# Altium PCB PCB1.PcbDoc
Units mm, origin at the board's own origin, x right, y up, seen from the top; angles counter-clockwise.
Board outline 39.37 x 23.49 mm, 2 copper layers (Top Layer, Bottom Layer); 20 components, 9 nets, 40 pads, 24 vias.
Unrouted connection lines stored in the file: 1.
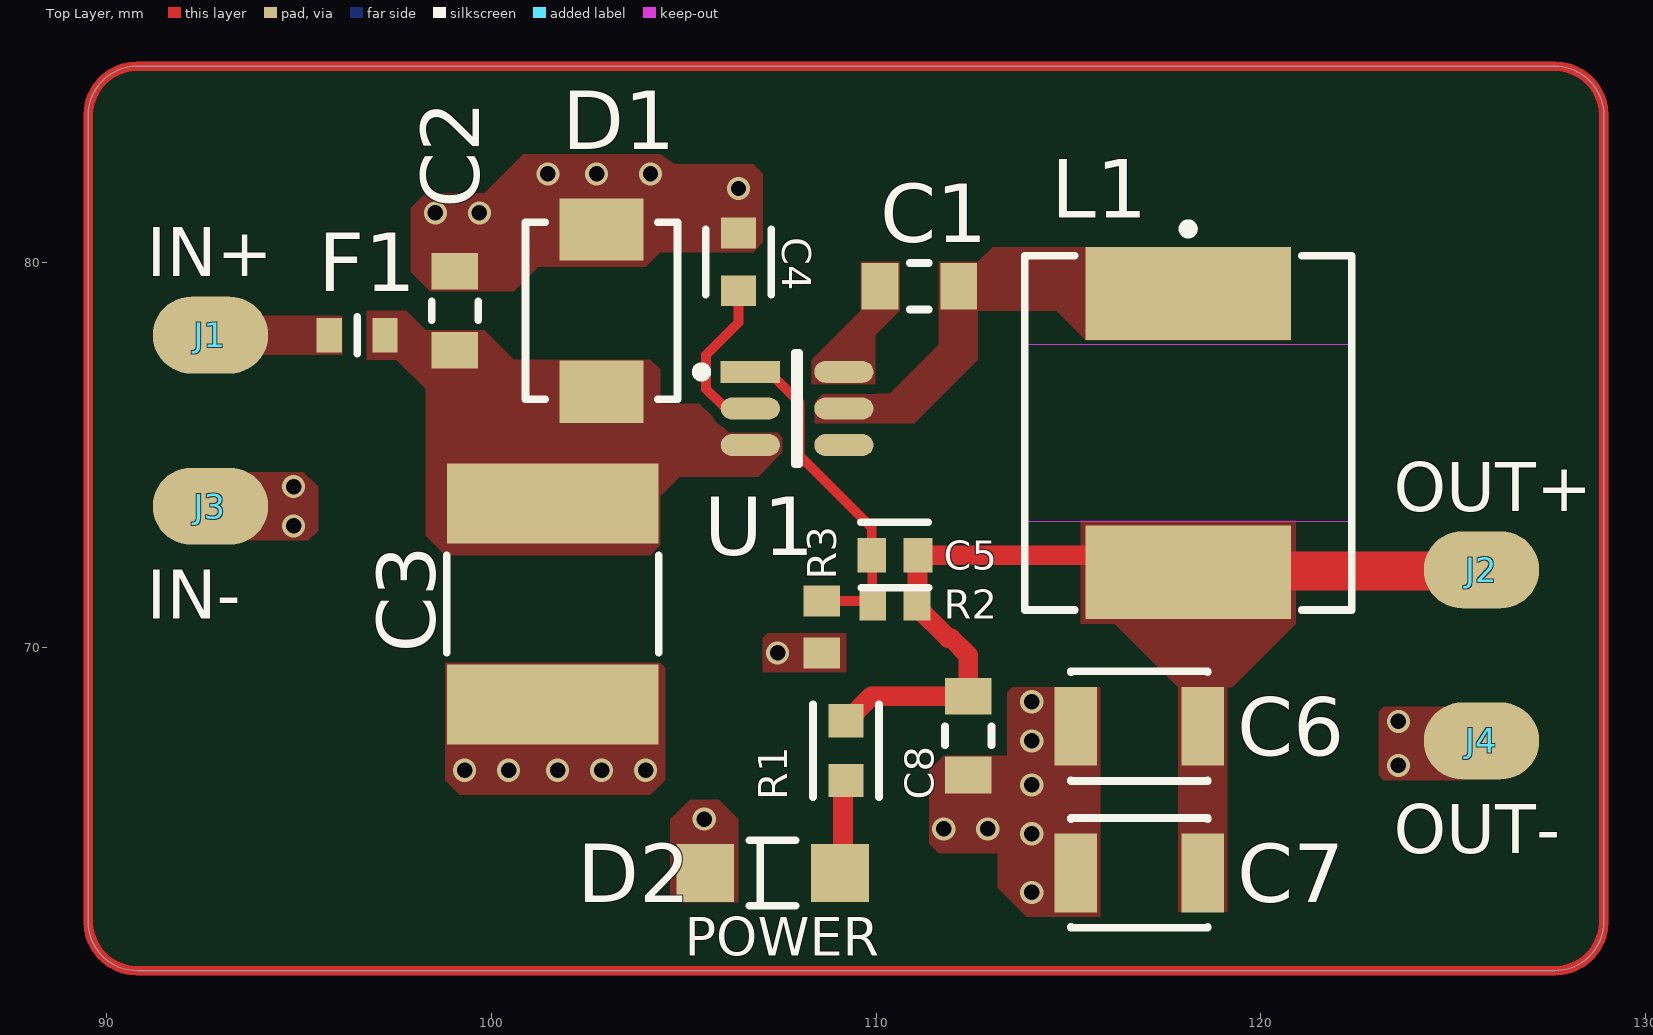
[diagram p0: Top Layer view]
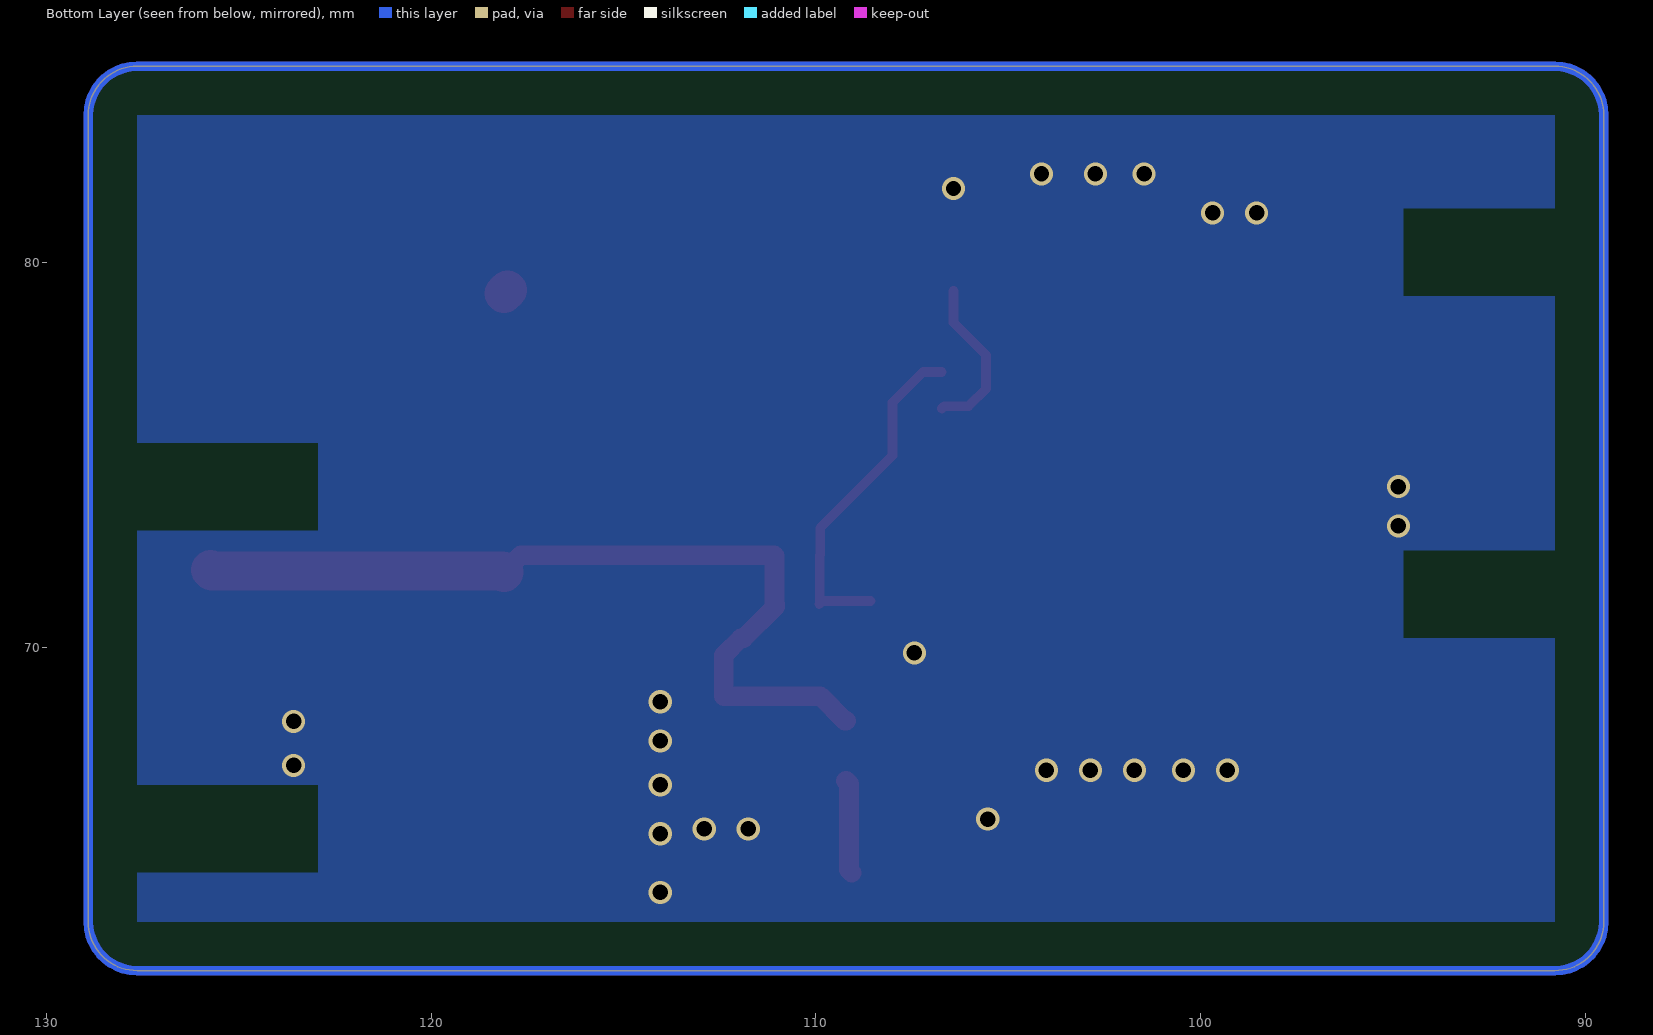
[diagram p1: Bottom Layer view, seen from below]
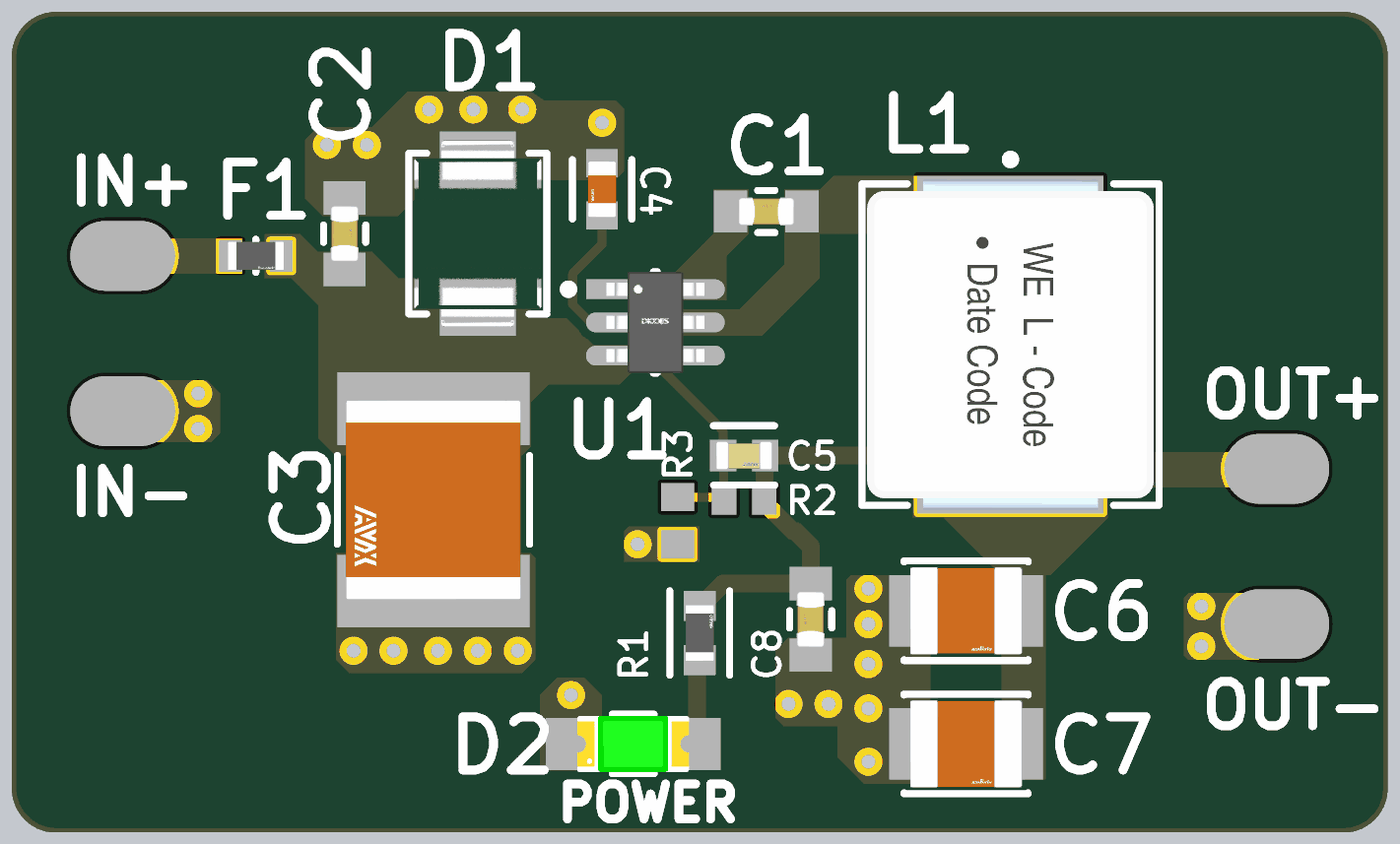
[diagram p2: 3D render of the assembled board from above, using the file's embedded part models]

## Layer stack, top to bottom
Top Solder: solder mask 0.0102, Solder Resist, Dk 3.5
Top Layer: signal copper 0.0356
Dielectric 1: dielectric 0.32, FR-4, Dk 4.8
Bottom Layer: signal copper 0.0356
Bottom Solder: solder mask 0.0102, Solder Resist, Dk 3.5

## Board outline
89.535,62.865 89.535,83.82 cw(c90.805,83.82) 90.805,85.09 127.635,85.09 cw(c127.635,83.82) 128.905,83.82 128.905,62.865 cw(c127.635,62.865) 127.635,61.595 90.805,61.595 cw(c90.805,62.865)

## Design rules (kind name [scope] priority, off if disabled: settings)
Clearance [All] p1: gap=0.254 ignorepadtopadclearanceinfootprint=FALSE
PolygonConnect [All] p1: connectstyle=Direct reliefconductorwidth=0.254 reliefentries=4 polygonreliefangle="90 Angle" airgapwidth=0.254
RoutingVias RoutingVias_1 [All] p1: holewidth=0.711 width=1.27 viastyle="Through Hole" minholewidth=0.711 minwidth=1.27 maxholewidth=0.711 maxwidth=1.27
RoutingVias [All] p2: holewidth=0.127 width=0.254 viastyle="Through Hole" minholewidth=0.127 minwidth=0.254 maxholewidth=0.711 maxwidth=1.27
SolderMaskExpansion [All] p1: expansion=0.102 istentingtop=FALSE
SupplyNets "Schematic Supply Nets_1" [InNet('V_OUT')] p1: voltage=0.000
SupplyNets "Schematic Supply Nets" [InNet('GND')] p2: voltage=0.000
Width [InNetClass('Power')] p1: maxlimit=1.524 minlimit=0.508 preferedwidth=1.27 bottomlayer_minwidth=1.016 minimp=50.000000 maximp=50.000000 favimp=50.000000
30 further rules are at their usual default settings.

## Classes and differential pairs
net class Power: BST SW V_OUT VIN

## Components (designator, comment, footprint, x,y, rotation, side; value= is the part's Value field where it differs from the comment)
C1 "100nF" FP-CGA3E-0_3-0_1-IPC_A 111.125,79.375 r0 top
C2 "100n" FP-CGA3E-0_3-0_1-IPC_A 99.06,78.74 r270 top
C3 "10uF" FP-2220-L_5_7_0_5-W_5_0_4-IPC_A 101.6,71.12 r270 top
C4 "22nF" FP-CC0603-DA-MFG 106.426,80.01 r90 top
C5 "56pF" FP-C0603C-CF-MFG 110.49,72.39 r180 top value="56 pF"
C6 "22uF" FP-GCM32E-0_35-e0_3_1_275-MFG 116.84,67.945 r0 top
C7 "22uF" FP-GCM32E-0_35-e0_3_1_275-MFG 116.84,64.135 r0 top
C8 "100nF" FP-CGA3E-0_3-0_1-IPC_A 112.395,67.7 r90 top
D1 "SMBJ33CA-TR" FP-SMB-CA-MFG 102.87,78.74 r270 top
D2 "HSMG-C150" FP-HSMG-C150-MFG 107.315,64.135 r0 top
F1 "ERBRE3R00V" FP-ERBRE-MFG 96.52,78.105 r0 top
J1 "Rounded pad" PCBComponent_1 92.71,78.105 r0 top
J2 "Rounded pad" PCBComponent_1 125.73,72.009 r0 top
J3 "Rounded pad" PCBComponent_1 92.71,73.66 r0 top
J4 "Rounded pad" PCBComponent_1 125.73,67.564 r0 top
L1 "6.8uH" WE-LHMI_8030 118.11,75.565 r270 top
R1 "1k" FP-AC0603-IPC_B 109.22,67.31 r90 top
R2 "158k" RESC1609X50X30LL10T20 110.49,71.12 r0 top
R3 "30.1k" RESC1608X55X30NL15T15 108.585,70.525 r90 top
U1 "AP63300WU-7" FP-TSOT26-IPC_A 107.95,76.2 r0 top

## Footprints (in the part's own frame and the unit in brackets; to place one, negate y for a bottom-side part, rotate by r counter-clockwise, add the part's x,y. Pads: shape width x height; smd on the part's side, far side on the other; paste and mask are expansions set on the pad)
FP-2220-L_5_7_0_5-W_5_0_4-IPC_A [mm]
  rect 2.082x5.503 smd paste+0 mask+0: 1(-2.61,0) 2(2.61,0)
  silkscreen extent -1.27,-2.75 1.27,2.75, body extent -4.15,-3.25 4.15,3.25, height 0.25
FP-AC0603-IPC_B [mm]
  rect 0.859x0.912 smd paste+0 mask+0: 1(-0.777,0) 2(0.777,0)
  silkscreen extent -1.21,-0.86 1.21,0.86, body extent -1.46,-0.71 1.46,0.71, height 0.25
FP-C0603C-CF-MFG [mm]
  rect 0.75x0.9 smd paste+0 mask+0: 1(-0.6,0) 2(0.6,0)
  silkscreen extent -0.87,-0.85 0.88,0.85, body extent -1.2,-0.6 1.2,0.6, height 0.25
FP-CC0603-DA-MFG [mm]
  rect 0.8x0.9 smd paste+0 mask+0: 1(-0.75,0) 2(0.75,0)
  silkscreen extent -0.85,-0.85 0.85,0.85, body extent -1.43,-0.82 1.43,0.82, height 0.25
FP-CGA3E-0_3-0_1-IPC_A [mm]
  rect 0.956x1.206 smd paste+0 mask+0: 1(-1.025,0) 2(1.025,0)
  silkscreen extent -0.25,-0.6 0.25,0.6, body extent -2,-1.1 2,1.1, height 0.25
FP-ERBRE-MFG [mm]
  rect 0.65x0.9 smd: 1(-0.725,0) 2(0.725,0)
  silkscreen extent 0,-0.47 0,0.47, body extent -1.15,-0.58 1.15,0.58, height 0.25
FP-GCM32E-0_35-e0_3_1_275-MFG [mm]
  rect 1.1x2.05 smd paste+0 mask+0: 1(-1.65,0) 2(1.65,0)
  silkscreen extent -1.78,-1.42 1.78,1.42, body extent -2.3,-1.53 2.3,1.53, height 0.25
FP-HSMG-C150-MFG [mm]
  rect 1.5x1.5 smd paste+0 mask+0: 1(-1.75,0) 2(1.75,0)
  silkscreen extent -0.6,-0.85 0.6,0.85, body extent -2.6,-0.95 2.6,0.95, height 0.25
FP-SMB-CA-MFG [mm]
  rect 1.62x2.18 smd paste+0 mask+0: 1(-2.11,0) 2(2.11,0)
  silkscreen extent -2.3,-1.98 2.3,1.98, body extent -3.02,-2.07 3.02,2.07, height 0.25
FP-TSOT26-IPC_A [mm]
  rect 1.54x0.566 smd paste+0 mask+0: 1(-1.215,0.95)
  rrect100% 1.54x0.566 smd paste+0 mask+0: 2(-1.215,0) 3(-1.215,-0.95) 4(1.215,-0.95) 5(1.215,0) 6(1.215,0.95)
  silkscreen extent -2.61,-1.45 0.05,1.45, body extent -2.49,-1.95 2.49,1.95, height 0.25
PCBComponent_1 [mm]
  oval 3x2 smd: 1(0,0)
RESC1608X55X30NL15T15 [mm] "Chip Resistor, 2-Leads, Body 1.60x0.80mm, IPC Medium Density"
  rect 0.8x0.95 smd: 1(-0.675,0) 2(0.675,0)
  body extent -0.87,-0.48 0.87,0.48, height 0.55
RESC1609X50X30LL10T20 [mm] "Chip Resistor, 2-Leads, Body 1.55x0.85mm, IPC High Density"
  rect 0.7x0.85 smd: 1(-0.575,0) 2(0.575,0)
  body extent -0.82,-0.48 0.82,0.48, height 0.5
WE-LHMI_8030 [mm] "SMT Power Inductor, 2-Leads, body 9.2x8.5mm"
  rect 2.42x5.33 smd: 1(-3.62,0) 2(3.62,0)
  Top Layer keep-out region: -2.31,4.25 2.31,4.25 2.31,-4.25 -2.31,-4.25
  silkscreen extent -5.42,-4.25 4.6,4.25, body extent -4.72,-4.1 4.73,4.1, height 3

## Part data
C1 C8: library part CMP-2000-07546-2, "Cap Ceramic 100nF 50V X7R 10% Pad SMD 0603 +125°C Automotive T/R", Case Code (Imperial)=0603, Case Code (Metric)=1608, Dielectric=X7R, Max Operating Temperature=125°C, Min Operating Temperature=-55°C, Package Quantity=1, Ratings=AEC-Q200, Tolerance=10%, Voltage=50V, Capacitance=100nF, Case/Package=0603, Composition=Ceramic, Depth=0.8mm, Height=0.8mm, Lead Free="Lead Free", Length=1.6mm, Mount="Surface Mount", Packaging="Tape and Reel", Radiation Hardening=No, REACH SVHC="No SVHC", Termination=SMD/SMT, Thickness=0.035inch, Voltage Rating=50V, Voltage Rating (DC)=50V, Weight=7.1E-05oz, Width=0.8mm
C2: library part CMP-2000-07546-2, "Cap Ceramic 100nF 50V X7R 10% Pad SMD 0603 +125°C Automotive T/R", Capacitance=100nF, Case Code (Imperial)=0603, Case Code (Metric)=1608, Dielectric=X7R, Max Operating Temperature=125°C, Min Operating Temperature=-55°C, Package Quantity=1, Ratings=AEC-Q200, Tolerance=10%, Voltage=50V, Case/Package=0603, Composition=Ceramic, Depth=0.8mm, Height=0.8mm, Lead Free="Lead Free", Length=1.6mm, Mount="Surface Mount", Packaging="Tape and Reel", Radiation Hardening=No, REACH SVHC="No SVHC", Termination=SMD/SMT, Thickness=0.035inch, Voltage Rating=50V, Voltage Rating (DC)=50V, Weight=7.1E-05oz, Width=0.8mm
C3: library part CMP-04427-001477-1, "General Purpose Ceramic Capacitor, 2220, 10uF, 10%, X7R, 15%, 50V", Case Code (Imperial)=2220, Case Code (Metric)=5750, Dielectric=X7R, Max Operating Temperature=125°C, Min Operating Temperature=-55°C, Package Quantity=500, Tolerance=10%, Voltage=50V, Capacitance=10uF, Case/Package=2220, Construction=Flat, Contact Plating=Tin, Depth=5mm, Dissipation Factor=2.5%, Height=2.79mm, Lead Free="Lead Free", Length=5.7mm, Mount="Surface Mount", Number of Pins=2, Packaging="Tape and Reel", Radiation Hardening=No, REACH SVHC="No SVHC", RoHS Compliant=Yes, Series=Standard, Termination=SMD/SMT, Thickness=0.11inch, Voltage Rating=50V, Voltage Rating (DC)=50V, Width=0.197inch
C4: library part CMP-2100-03602-3, "CAP CER 0.022UF 50V X7R 0603", Case Code (Imperial)=0603, Case Code (Metric)=1608, Dielectric=X7R, Dielectric Material=Ceramic, Insulation Resistance=100GR, Max Operating Temperature=125°C, Min Operating Temperature=-55°C, Package Quantity=1, Tolerance=10%, Voltage=50V, Capacitance=22nF, Case/Package=0603, Depth=0.8mm, Halogen Free="Halogen Free", Height=0.8mm, Lead Free="Lead Free", Length=1.6mm, Mount="Surface Mount", Number of Pins=2, Packaging="Tape and Reel", Radiation Hardening=No, REACH SVHC="No SVHC", Resistor Type=Ceramic, RoHS Compliant=Yes, Series=CC, Termination=SMD/SMT, Thickness=0.035inch, Voltage Rating=50V, Voltage Rating (DC)=50V, Width=0.031inch
C5: library part CMP-2006-03385-2, "CAP CER 56PF 50V 1% NP0 0603", Capacitance="56 pF", Manufacturer=KEMET, Manufacturer Part Number=C0603C560F5GACTU, Package=C0603C-CF, Temperature="-55°C to +125°C", Temperature Characteristic=C0G, Temperature Coefficient=30ppm/°C, Temperature Range High=+125°C, Temperature Range Low=-55°C, Tolerance=0.01, Voltage Rating="50 V", Automotive=Yes, Automotive Grade="Grade 1", Category=Cap, ComponentLink2Description=Datasheet, ComponentLink2URL=https://api.kemet.com/component-edge/download/datasheet/C0603C100J5GACAUTO.pdf, Device Class L1="Passive Components", Device Class L2=Capacitors, Device Class L3="Ceramic Capacitors", Digikey Description="CAP CER 56PF 50V 1% NP0 0603", Height=0.87mm, Lead Free=Yes, Material=Ceramic, Mouser Description="Multilayer Ceramic Capacitors MLCC - SMD/SMT 50volts 56pF C0G 1%", Octopart=https://octopart.com/c0603c560f5gactu-kemet-9143760, RoHS=TRUE
C6 C7: library part CMP-06035-055667-1, "Ceramic Capacitor for Automotive 22uF ±10% 25VDC X8L 1210 Embossed T/R"
D1: library part CMP-12225-000040-1, "TVS DIODE 33V 69.7V SMB", Breakdown Voltage=36.7V, Clamping Voltage=53.3V, Manufacturer=STMicroelectronics, Max Junction Temp=+150°C, Package=SMB-CA, Peak Pulse Current=11.8A, Peak Pulse Power=600W, Reverse Standoff Voltage=33V, Temperature="-55°C to +150°C", Temperature Range Low=-55°C, Automotive=No, Category=Diode, ComponentLink2Description=Datasheet, ComponentLink2URL=https://www.st.com/resource/en/datasheet/smbj.pdf, Device Class L1="Circuit Protection", Device Class L2="TVS Diodes", Device Class L3=unset, Digikey Description="TVS DIODE 33V 69.7V SMB", Direction=Bidirectional, Height=2.65mm, Lead Free=Yes, Manufacturer Part Number=SMBJ33CA-TR, Mouser Description="TVS Diodes - Transient Voltage Suppressors 600W 33V Bidirect", Number Of Channels=1, Octopart=https://octopart.com/smbj33ca-tr-stmicroelectronics-347069, RoHS=TRUE, Standoff Height=0.05mm, Temperature Range High=+150°C
D2: library part CMP-2000-05061-2, "LED GREEN DIFFUSED 1206 SMD", Colour=Green, Forward Current=20mA, Forward Voltage=2.2V, Manufacturer=Broadcom, Max Junction Temp=+95°C, Power Dissipation=65mW, Reverse Voltage=5V, Temperature="-40°C to +85°C", Temperature Range High=+85°C, Temperature Range Low=-40°C, Automotive=No, Category=Diode, ComponentLink2Description=Datasheet, ComponentLink2URL=https://docs.broadcom.com/docs/AV02-0551EN, Device Class L1=Optoelectronics, Device Class L2=LEDs, Device Class L3=unset, Digikey Description="LED GREEN DIFFUSED 1206 SMD", Height=1.2mm, Ipc Land Pattern Name=DIOCP320160X55, Lead Free=Yes, Led Orientation="Top View", Luminous Intensity=15mcd, Manufacturer Part Number=HSMG-C150, Mouser Description="LED Uni-Color Green 570nm 2-Pin Chip LED T/R", Octopart=https://octopart.com/hsmg-c150-broadcom-71131304, Package=HSMG-C150, Peak Emmision Wavelength=570nm, RoHS=TRUE, Viewing Angle=170°, Wavelength=572nm
F1: library part CMP-00287-20105398-1, "ERBRE3R00V Fuse Chip Fast Acting 3A 32V SMD Solder Pad 0603 1.6 X 0.8 X 0.54mm T/R UL/cUL", Case Code (Imperial)=0603, Case Code (Metric)=1608, Current=3A, Max Operating Temperature=125°C, Max Voltage Rating (DC)=32V, Min Operating Temperature=-40°C, Resistance=33mΩ, Approvals=UL, Body Material=Alumina, Case/Package=0603, Current Rating=3A, Depth=800µm, Fuse Current=3A, Height=640µm, Length=1.6mm, Lifecycle Status=Production, Mount="Surface Mount", Number of Pins=2, Packaging="Cut Tape", REACH SVHC="No SVHC", RoHS=Compliant, Voltage Rating=32V, Voltage Rating (DC)=32V, Width=800µm
L1: library part CMP-03913-61645301-4, "74437356068 Power Inductor, 6.8Uh, Shielded, 5.1A Rohs Compliant: Yes", Ambient Temperature Range High=85°C, Ambient Temperature Range Low=-40°C, Case/Package=Nonstandard, Current Rating=5.1A, DC Resistance (DCR)=35.5mΩ, Inductance=6.8µH, Max Operating Temperature=125°C, Saturation Current=6.9A, Self Resonant Frequency=14MHz, Test Frequency=100kHz, Tolerance=20%, Composition=Wirewound, Core Material=Ferrite, Height=3mm, Height - Seated (Max)=2.9972mm, Length=9.7mm, Min Operating Temperature=-40°C, Mount="Surface Mount", NexarPartId=61645301, Packaging="Tape & Reel (TR)", RoHS=Compliant, Shielding=Shielded, Width=8.5mm
R1: library part CMP-2000-04828-3, "RES 1kΩ 1.00% 0.1W 0603", Case Code (Imperial)=0603, Case Code (Metric)=1608, Max Operating Temperature=155°C, Max Power Dissipation=100mW, Min Operating Temperature=-55°C, Package Quantity=1, Ratings=AEC-Q200, Resistance=1kR, Resistor Type="Thick Film", Temperature Coefficient=100ppm/°C, Tolerance=1%, Voltage Rating=50V, Case/Package=0603, Construction=Rectangular, Depth=0.8mm, Features="Moisture Resistant", Height=0.022inch, Lead Free="Lead Free", Length=0.063inch, Military Standard=Not, Number of Terminations=2, Packaging="Tape and Reel", Power Rating=100mW, RoHS Compliant=Yes, Series=AC, Size Code=0603, Termination=SMD/SMT, Width=0.031inch
R2: library part CMP-2000-03225-1, Manufacturer="Vishay Dale", Part Number=CRCW060330K1FKEA
R3: library part CMP-1012-00756-2, Manufacturer=Panasonic, Part Number=ERJ-3EKF1583V
U1: library part CMP-12757-000025-1, "DCDC CONV HV BUCK TSOT26"

## Via types
v1: diameter 0.6, hole 0.4, Top Layer to Bottom Layer, 24 vias

## Nets (pads, with @x,y where several pads share a name; then routed paths per layer and width w, separated by ;. In a path a pad name is that pad's centre, name@x,y a point inside that pad or via, vN(x,y) a via of type N, cw(c..) or ccw(c..) an arc to the next point about the centre after c; other vN are vias at no path point)
BST: C1.1 U1.6
EN: C4.1 U1.2 | length 4.3
  Top Layer w0.254: C4.1 106.426,78.433 105.584,77.591 105.584,76.709 106.033,76.26 106.675,76.26 U1.2
FB: C5.2 R2.1 R3.2 U1.1 | length 9
  Top Layer w0.254: U1.1 107.221,77.15 108.015,76.357 108.015,74.975 109.89,73.1 C5.2 109.902,72.378 R2.1@109.902,71.132 ; R3.2 109.835,71.2 R2.1@109.902,71.132 ; R2.1 R2.1@109.902,71.132
GND: C2.1 C3.2 C4.2 C6.1 C7.1 C8.1 D1.1 D2.1 J3.1 J4.1 R3.1 U1.4
  other v1: 114.046,63.627 114.046,65.151 111.76,65.278 112.903,65.278 105.537,65.532 114.046,66.421 99.314,66.802 100.457,66.802 101.727,66.802 102.87,66.802 104.013,66.802 123.571,66.929 114.046,67.564 123.571,68.072 114.046,68.58 107.442,69.85 94.869,73.152 94.869,74.168 98.552,81.28 99.695,81.28 106.426,81.915 101.473,82.296 102.743,82.296 104.14,82.296
NetD2_2: D2.2 R1.1 | length 2.5
  Top Layer w0.508: D2.2 109.143,64.212 109.143,66.456 R1.1
NetF1_1: F1.1 J1.1
SW: C1.2 L1.1 U1.5 | length 0.1
  Top Layer w1.016: L1.1@118.015,79.28 L1.1
V_OUT: C5.1 C6.2 C7.2 C8.2 J2.1 L1.2 R1.2 R2.2 | length 22.6
  Top Layer w0.508: R1.2 109.247,68.087 109.885,68.725 C8.2 112.395,69.79 111.954,70.231 111.879,70.231 111.065,71.045 R2.2 111.078,71.132 111.078,72.378 C5.1 117.665,72.39 L1.2
  Top Layer w1.016: L1.2 118.142,71.977 125.698,71.977 J2.1
VIN: C2.2 C3.1 D1.2 F1.2 U1.3

## Polygon pours and split planes (outlines as drawn)
SW on Top Layer "SW_L01_P028" (solid, pour order 28): 108.331,76.454 108.458,76.581 108.585,76.581 110.363,76.581 111.633,77.851 111.633,80.01 112.649,80.01 113.03,80.391 120.777,80.391 120.777,77.978 115.443,77.978 114.681,78.74 112.649,78.74 112.649,77.47 110.998,75.819 108.331,75.819
GND on Top Layer "GND_L01_P025" (solid, pour order 25): 93.091,74.549 95.123,74.549 95.504,74.168 95.504,73.025 95.25,72.771 93.218,72.771 93.091,72.898
GND on Top Layer "GND_L01_P024" (solid, pour order 24): 109.22,70.358 107.188,70.358 107.061,70.231 107.061,69.342 109.22,69.342
GND on Top Layer "GND_L01_P022" (solid, pour order 22): 98.425,79.248 99.695,79.248 100.584,79.248 101.219,79.883 101.6,79.883 101.727,79.883 104.013,79.883 104.394,80.264 106.807,80.264 107.061,80.518 107.061,82.296 106.807,82.55 104.775,82.55 104.394,82.804 104.267,82.804 100.838,82.804 100.711,82.677 99.822,81.788 98.298,81.788 97.917,81.407 97.917,79.756
GND on Top Layer "GND_L01_P021" (solid, pour order 21): 106.426,63.373 106.426,65.532 105.918,66.04 105.156,66.04 104.648,65.532 104.648,63.373
GND on Top Layer "GND_L01_P020" (solid, pour order 20): 98.806,69.596 98.806,66.548 99.187,66.167 104.14,66.167 104.521,66.548 104.521,69.469 104.394,69.596
GND on Top Layer "GND_L01_P018" (solid, pour order 18): 113.538,68.961 113.411,68.834 113.411,67.183 111.76,67.183 111.379,66.802 111.379,64.897 111.633,64.643 113.157,64.643 113.157,63.754 113.919,62.992 115.824,62.992 115.824,68.961
GND on Top Layer "GND_L01_P017" (solid, pour order 17): 125.222,68.453 123.19,68.453 123.063,68.326 123.063,66.675 123.19,66.548 125.222,66.548 125.222,67.945 125.095,68.072
NetF1_1 on Top Layer "NETF1_1_L01_P008" (solid, pour order 8): 96.139,78.613 96.139,77.597 93.599,77.597 93.599,78.613
V_OUT on Top Layer "V_OUT_L01_P007" (solid, pour order 7): 115.316,73.279 120.904,73.279 120.904,70.612 119.253,68.961 119.126,68.961 119.126,63.119 117.856,63.119 117.856,68.961 116.205,70.612 115.316,70.612
BST on Top Layer "BST_L01_P003" (solid, pour order 3): 109.601,80.01 110.617,80.01 110.617,78.74 109.982,78.105 109.982,76.835 108.331,76.835 108.331,77.47 109.601,78.74
VIN on Top Layer "VIN_L01_P002" (solid, pour order 2): 106.172,75.565 107.442,75.565 107.569,75.438 107.569,75.057 106.934,74.422 104.902,74.422 103.886,73.406 103.886,76.327 105.41,76.327
VIN on Top Layer "VIN_L01_P000" (solid, remove dead copper, pour order 0): 96.774,78.74 97.79,78.74 98.298,78.232 99.822,78.232 100.584,77.47 104.14,77.47 104.394,77.216 104.394,72.644 104.14,72.39 98.806,72.39 98.298,72.898 98.298,76.708 97.536,77.47 96.774,77.47
GND on Bottom Layer "GND_L02_P009" (solid, pour order 9): 90.805,83.82 127.635,83.82 127.635,62.865 90.805,62.865

## Other copper
Multi-Layer:
  the board outline again, w0.254

## Silkscreen, mask and mechanical layers (free items; w line width, h text height)
Top Overlay:
  text "IN+" at 91.059,79.629 h1.27
  text "OUT+" at 123.444,73.533 h1.27
  text "IN-" at 91.059,70.739 h1.27
  text "OUT-" at 123.444,64.643 h1.27
  text "POWER" at 105.029,61.976 h1